# EAGLE board Schematic v12 (EAGLE 9.7.0)
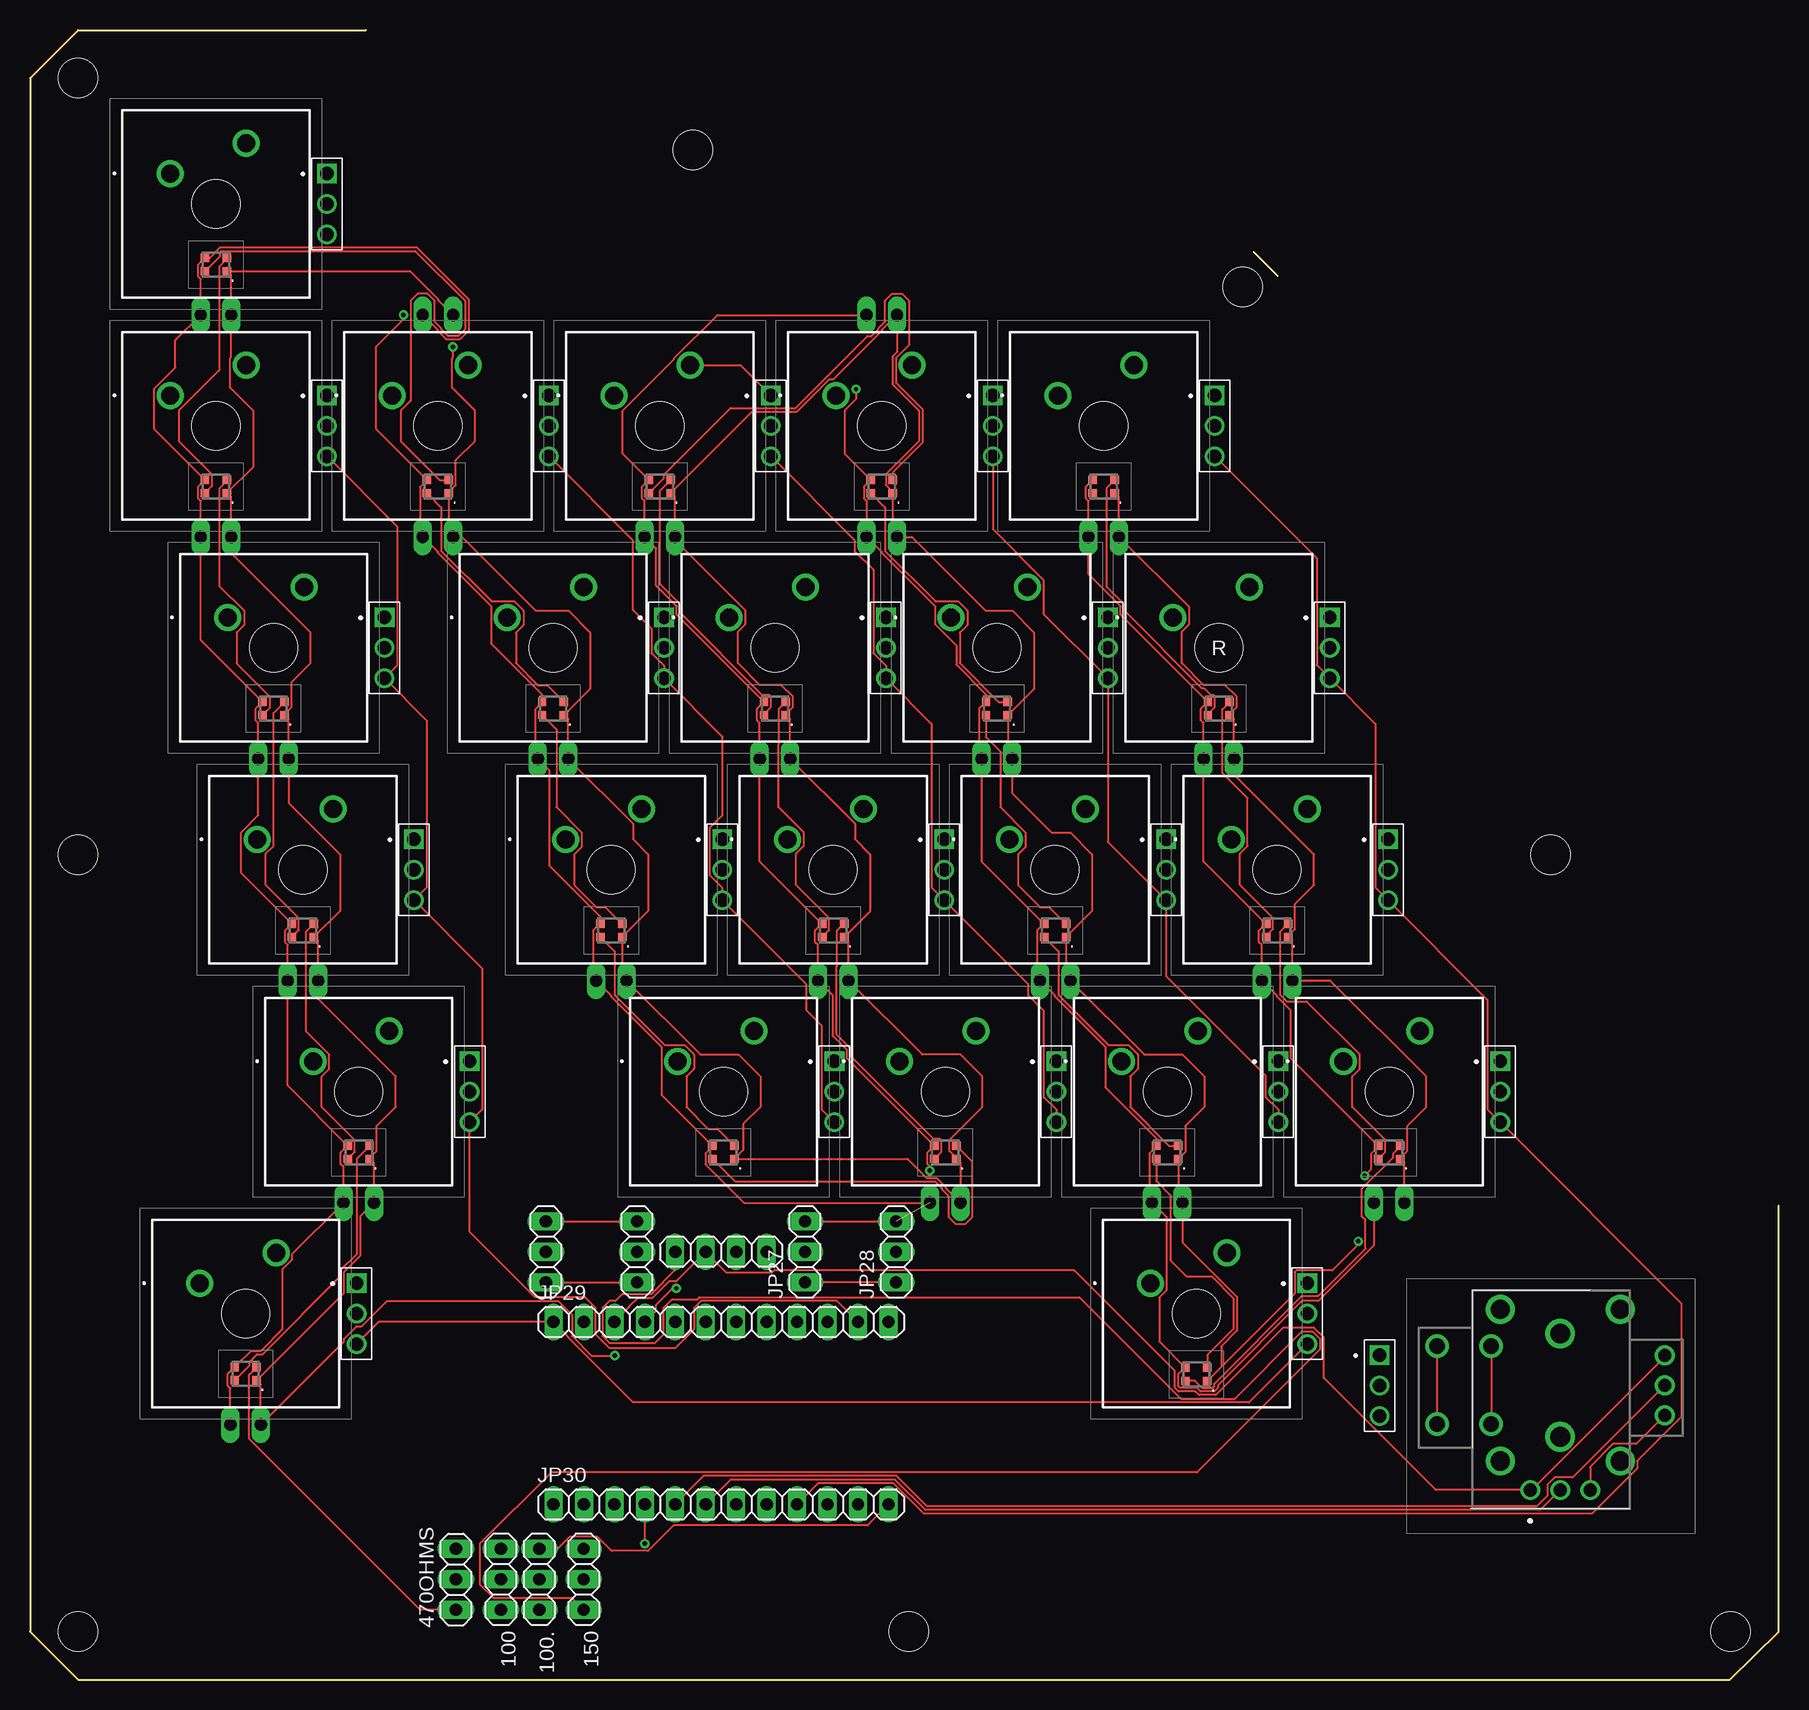
[diagram p0: board, top side]
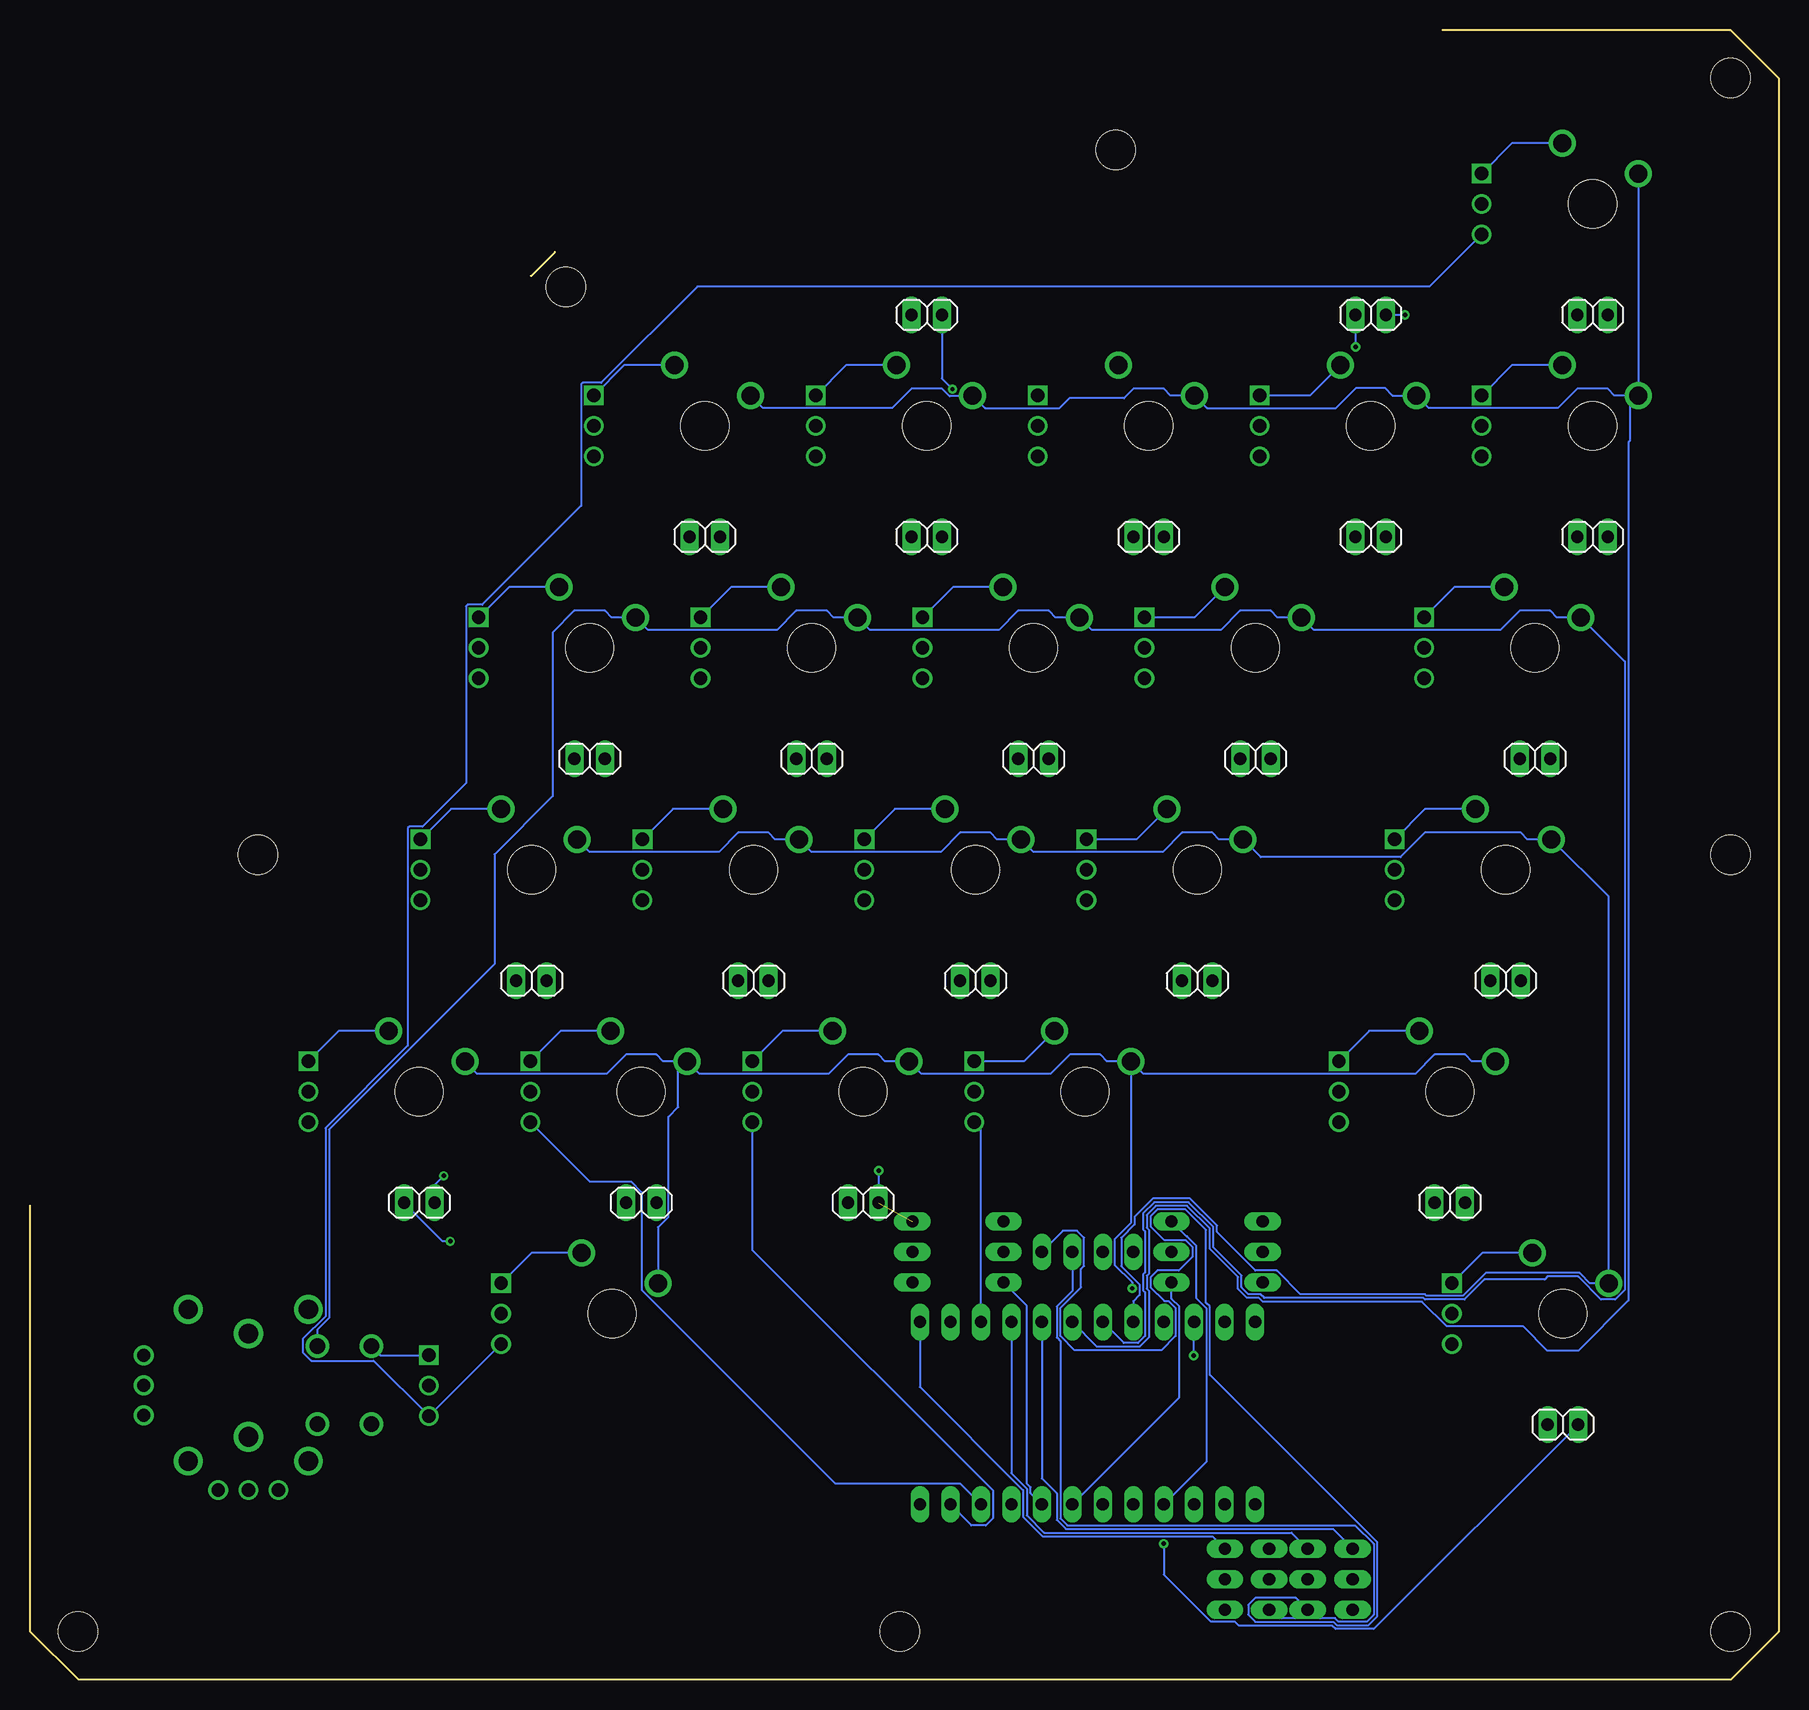
[diagram p1: board, bottom side, seen from below]

Size 145.75 x 137.5 mm. Coordinates in mm from the lower left corner, seen from the top.
Outline: 28,137.5 4,137.5 0,133.5 0,4 4,0 141.7,0 145.75,4 145.75,39.5
Outline: 104,117 102,119
Copper layers (1*16): Top / Bottom
Stack-up Default Layer Stack: Top User Defined 0.035mm / Dielectric-1 User Defined 1.5mm / Bottom User Defined 0.035mm
Design rules "default": minimum track width 6mil, minimum drill 0.35mm, track to track 6mil, track to pad 6mil, pad to pad 6mil, via to via 6mil, smd to smd 6mil, copper to edge 40mil, drill to drill 6mil, minimum pad ring 10mil, minimum via ring 8mil, stop-mask expansion 4mil, vias tented up to drill 0mil, thermal gap 10mil
Holes 3.25 mm at 4,133.5 4,4 141.75,4 101.08,116.08 73.25,4 4,68.75 126.75,68.75 55.25,127.5

## Footprints (pad centres in the part's own frame; a part is rotated, then mirrored left to right if it is on the bottom)
MX1AE1NW = drill 1.499 pad 2.248: 1 0,0; 2 6.35,2.54 | hole 3.988: 3.81,-2.54
1X03 = drill 1.016 long: 1 -2.54,0; 2 0,0; 3 2.54,0
RKJXV122400R = drill 1.3 pad 1.95: A1 -11.98,-3.25; B1 -11.98,-7.75; C1 -5.48,-3.25; D1 -5.48,-7.75 | drill 1.1 pad 1.65: A11 0,0; A12 0,2.5; A13 0,5; B11 -6.23,11.23; B12 -8.73,11.23; B13 -11.23,11.23 | drill 1.6 pad 2.4: MH1 -15.055,-2.5; MH2 -15.055,7.5; MH3 -2.405,-2.5; MH4 -2.405,7.5 | drill 1.65 pad 2.475: MH5 -13.03,2.5; MH6 -4.43,2.5
61300311121 = drill 1.1 square: 1 -2.54,0 | drill 1.1: 2 0,0; 3 2.54,0
1X04 = drill 1.016 long: 1 -3.81,0; 2 -1.27,0; 3 1.27,0; 4 3.81,0
1X02 = drill 1.016 long: 1 -1.27,0; 2 1.27,0
1X12 = drill 1.016 long: 1 -13.97,0; 2 -11.43,0; 3 -8.89,0; 4 -6.35,0; 5 -3.81,0; 6 -1.27,0; 7 1.27,0; 8 3.81,0; 9 6.35,0; 10 8.89,0; 11 11.43,0; 12 13.97,0
WS2812B2020 = smd 0.7 x 0.7: 1 0.915,-0.55; 2 0.915,0.55; 3 -0.915,0.55; 4 -0.915,-0.55

## Placement (x,y rotation side)
1  MX1A-E1NW  [MX1AE1NW]  30.19,107.04 0 top
2  MX1A-E1NW  [MX1AE1NW]  48.69,107.04 0 top
3  MX1A-E1NW  [MX1AE1NW]  67.19,107.04 0 top
4  MX1A-E1NW  [MX1AE1NW]  85.69,107.04 0 top
100  PINHD-1X3  [1X03]  39.25,8.35 270 top
100.  PINHD-1X3  [1X03]  42.45,8.35 270 top
150  PINHD-1X3  [1X03]  46.15,8.35 270 top
470OHMS  PINHD-1X3  [1X03]  35.5,8.35 90 top
A  MX1A-E1NW  [MX1AE1NW]  44.64,70.04 0 top
A_STICK  RKJXV122400R  [RKJXV122400R]  125.05,15.8 270 top
C  MX1A-E1NW  [MX1AE1NW]  90.99,51.54 0 top
CAPS  MX1A-E1NW  [MX1AE1NW]  18.94,70.04 0 top
CTRL  MX1A-E1NW  [MX1AE1NW]  14.16,33.04 0 top
D  MX1A-E1NW  [MX1AE1NW]  81.64,70.04 0 top
E  MX1A-E1NW  [MX1AE1NW]  76.79,88.54 0 top
ESC  MX1A-E1NW  [MX1AE1NW]  11.69,125.54 0 top
F  MX1A-E1NW  [MX1AE1NW]  100.14,70.04 0 top
J1  61300311121  [61300311121]  24.75,104.5 270 top
J2  61300311121  [61300311121]  24.75,123 270 top
J3  61300311121  [61300311121]  29.55,86 270 top
J4  61300311121  [61300311121]  32,67.5 270 top
J5  61300311121  [61300311121]  36.65,49 270 top
J6  61300311121  [61300311121]  27.23,30.5 270 top
J7  61300311121  [61300311121]  43.25,104.5 270 top
J8  61300311121  [61300311121]  52.85,86 270 top
J9  61300311121  [61300311121]  57.7,67.5 270 top
J10  61300311121  [61300311121]  67.05,49 270 top
J11  61300311121  [61300311121]  85.55,49 270 top
J12  61300311121  [61300311121]  76.2,67.5 270 top
J13  61300311121  [61300311121]  71.35,86 270 top
J14  61300311121  [61300311121]  61.75,104.5 270 top
J15  61300311121  [61300311121]  80.25,104.5 270 top
J16  61300311121  [61300311121]  89.85,86 270 top
J17  61300311121  [61300311121]  94.7,67.5 270 top
J18  61300311121  [61300311121]  104.05,49 270 top
J19  61300311121  [61300311121]  98.75,104.5 270 top
J20  61300311121  [61300311121]  108.35,86 270 top
J21  61300311121  [61300311121]  113.2,67.5 270 top
J22  61300311121  [61300311121]  122.55,49 270 top
J23  61300311121  [61300311121]  106.47,30.5 270 top
J26  61300311121  [61300311121]  112.5,24.5 270 top
JP1  PINHD-1X3  [1X03]  50.6,35.65 90 top
JP2  PINHD-1X3  [1X03]  43,35.65 90 top
JP3  PINHD-1X4  [1X04]  57.6,35.65 0 top
JP4  PINHD-1X2  [1X02]  17.98,21.25 0 bottom
JP5  PINHD-1X2  [1X02]  27.4,39.75 0 bottom
JP6  PINHD-1X2  [1X02]  22.75,58.25 0 bottom
JP7  PINHD-1X2  [1X02]  20.3,76.75 0 bottom
JP8  PINHD-1X2  [1X02]  15.5,95.25 0 bottom
JP9  PINHD-1X2  [1X02]  15.5,113.75 0 bottom
JP10  PINHD-1X2  [1X02]  34,113.75 0 bottom
JP11  PINHD-1X2  [1X02]  34,95.25 0 bottom
JP12  PINHD-1X2  [1X02]  43.6,76.75 0 bottom
JP13  PINHD-1X2  [1X02]  48.45,58.25 0 bottom
JP14  PINHD-1X2  [1X02]  76.3,39.75 0 bottom
JP15  PINHD-1X2  [1X02]  66.95,58.25 0 bottom
JP16  PINHD-1X2  [1X02]  62.1,76.75 0 bottom
JP17  PINHD-1X2  [1X02]  52.5,95.25 0 bottom
JP18  PINHD-1X2  [1X02]  71,113.75 0 bottom
JP19  PINHD-1X2  [1X02]  71,95.25 0 bottom
JP20  PINHD-1X2  [1X02]  80.6,76.75 0 bottom
JP21  PINHD-1X2  [1X02]  85.45,58.25 0 bottom
JP22  PINHD-1X2  [1X02]  94.8,39.75 0 bottom
JP23  PINHD-1X2  [1X02]  113.3,39.75 0 bottom
JP24  PINHD-1X2  [1X02]  103.95,58.25 0 bottom
JP25  PINHD-1X2  [1X02]  99.1,76.75 0 bottom
JP26  PINHD-1X2  [1X02]  89.5,95.25 0 bottom
JP27  PINHD-1X3  [1X03]  64.6,35.65 90 top
JP28  PINHD-1X3  [1X03]  72.2,35.65 90 top
JP29  PINHD-1X12  [1X12]  57.6,29.8 0 top
JP30  PINHD-1X12  [1X12]  57.6,14.6 0 top
LED1  WS2812B-2020  [WS2812B2020]  17.98,25.49 0 top
LED2  WS2812B-2020  [WS2812B2020]  27.4,43.95 0 top
LED3  WS2812B-2020  [WS2812B2020]  22.75,62.45 0 top
LED4  WS2812B-2020  [WS2812B2020]  20.3,80.95 0 top
LED5  WS2812B-2020  [WS2812B2020]  15.5,99.45 0 top
LED6  WS2812B-2020  [WS2812B2020]  15.5,117.95 0 top
LED7  WS2812B-2020  [WS2812B2020]  34,99.45 0 top
LED8  WS2812B-2020  [WS2812B2020]  43.6,80.95 0 top
LED9  WS2812B-2020  [WS2812B2020]  48.45,62.45 0 top
LED10  WS2812B-2020  [WS2812B2020]  57.8,43.95 0 top
LED11  WS2812B-2020  [WS2812B2020]  76.3,43.95 0 top
LED12  WS2812B-2020  [WS2812B2020]  66.95,62.45 0 top
LED13  WS2812B-2020  [WS2812B2020]  62.1,80.95 0 top
LED14  WS2812B-2020  [WS2812B2020]  52.5,99.45 0 top
LED15  WS2812B-2020  [WS2812B2020]  71,99.45 0 top
LED16  WS2812B-2020  [WS2812B2020]  80.6,80.95 0 top
LED17  WS2812B-2020  [WS2812B2020]  85.45,62.45 0 top
LED18  WS2812B-2020  [WS2812B2020]  94.8,43.95 0 top
LED19  WS2812B-2020  [WS2812B2020]  97.22,25.45 0 top
LED20  WS2812B-2020  [WS2812B2020]  113.3,43.95 0 top
LED21  WS2812B-2020  [WS2812B2020]  103.95,62.45 0 top
LED22  WS2812B-2020  [WS2812B2020]  99.1,80.95 0 top
LED23  WS2812B-2020  [WS2812B2020]  89.5,99.45 0 top
Q  MX1A-E1NW  [MX1AE1NW]  39.79,88.54 0 top
R  MX1A-E1NW  [MX1AE1NW]  95.29,88.54 0 top
S  MX1A-E1NW  [MX1AE1NW]  63.14,70.04 0 top
SHIFT  MX1A-E1NW  [MX1AE1NW]  23.59,51.54 0 top
SPACE  MX1A-E1NW  [MX1AE1NW]  93.42,33.04 0 top
TAB  MX1A-E1NW  [MX1AE1NW]  16.49,88.54 0 top
V  MX1A-E1NW  [MX1AE1NW]  109.49,51.54 0 top
W  MX1A-E1NW  [MX1AE1NW]  58.29,88.54 0 top
X  MX1A-E1NW  [MX1AE1NW]  72.49,51.54 0 top
Z  MX1A-E1NW  [MX1AE1NW]  53.99,51.54 0 top
~  MX1A-E1NW  [MX1AE1NW]  11.69,107.04 0 top

## Library data of the parts
1-4 A C CAPS CTRL D E ESC F Q R S SHIFT SPACE TAB V W X Z ~ = SamacSys_Parts; DESCRIPTION: Pushbutton Switches Full Travel, Mech. Keyswitch, Click Tactile Feel (Blue stem), 60cN, No LED, No Diode, Fixation Pins for PCB Mounting; HEIGHT: 15.2mm; MANUFACTURER_NAME: Cherry; MANUFACTURER_PART_NUMBER: MX1A-E1NW; MOUSER_PART_NUMBER: 540-MX1A-E1NW; MOUSER_PRICE-STOCK: https://www.mouser.co.uk/ProductDetail/CHERRY/MX1A-E1NW/?qs=Z7NFYKyvgJd45Wm4xzFv7w%3D%3D
100 100. 150 470OHMS JP1-JP30 = Connector; CATEGORY: CONNECTOR; SUB-CATEGORY: PIN-HEADER
A_STICK = SamacSys_Parts; DESCRIPTION: RKJXV122400R; HEIGHT: 18.95mm; MANUFACTURER_NAME: ALPS; MANUFACTURER_PART_NUMBER: RKJXV122400R; MOUSER_PART_NUMBER: 688-RKJXV122400R; MOUSER_PRICE-STOCK: https://www.mouser.co.uk/ProductDetail/ALPS/RKJXV122400R?qs=GedFDFLaBXEbB%252ByoOVwLBg%3D%3D
J1-J23 J26 = Headers; CREATED_BY: PCBLayout.com; DIGI_KEY_PART_NUMBER: 732-5316-ND; MANUFACTURER: Wurth Electronics Inc.; MPN: 61300311121
LED1-LED23 = WS2812B-2020; DESCRIPTION: LED; SMD; 2020; RGB; 2x2x0.84mm; 3.75.3V; Lens: transparent; 2kHz; HEIGHT: 0.84mm; MANUFACTURER_NAME: Worldsemi; MANUFACTURER_PART_NUMBER: WS2812B-2020

## Nets
N$1: J1.1 ~.2
N$2: ESC.2 J2.1
N$3: J3.1 TAB.2
N$4: CAPS.2 J4.1
N$5: J5.1 SHIFT.2
N$6: CTRL.2 J6.1
N$7: J11.1 X.2
N$8: J12.1 S.2
N$9: J13.1 W.2
N$10: 2.2 J14.1
N$11: 3.2 J15.1
N$12: E.2 J16.1
N$13: D.2 J17.1
N$14: C.2 J18.1
N$15: 4.2 J19.1
N$16: J20.1 R.2
N$17: F.2 J21.1
N$18: J22.1 V.2
N$19: J23.1 SPACE.2
N$20: 470OHMS.1 LED1.2
N$21: A.1 CAPS.1 CTRL.1 D.1 F.1 JP29.5 S.1
N$22: A_STICK.A1 A_STICK.C1 E.1 JP29.6 Q.1 R.1 TAB.1 W.1
N$23: 1.1 2.1 3.1 4.1 ESC.1 JP29.7 ~.1
N$24: 150.1 JP29.12
N$25: 1.2 J7.1
N$26: J8.1 Q.2
N$27: A.2 J9.1
N$28: J10.1 Z.2
N$29: J7.3 J8.3 J9.3 J10.3 JP29.10
N$30: J11.3 J12.3 J13.3 J14.3 JP30.11
N$31: J15.3 J16.3 J17.3 J18.3 JP30.10
N$32: J19.3 J20.3 J21.3 J22.3 JP30.9
N$33: J2.3 J6.3 J23.3 J26.3 JP29.1
N$34: 100..1 JP30.12
N$35: 100.1 JP29.9
N$36: 470OHMS.3 JP29.8
N$37: A_STICK.B12 JP30.5
N$38: 150.3 JP3.1
N$39: JP1.1 JP2.1 JP30.7
N$40: A_STICK.A13 A_STICK.B11
N$41: JP1.3 JP2.3 JP4.2 JP5.2 JP6.2 JP7.2 JP8.2 JP9.2 JP10.2 JP11.2 JP12.2 JP13.2 JP14.2 JP15.2 JP16.2 JP17.2 JP18.2 JP19.2 JP20.2 JP21.2 JP22.2 JP23.2 JP24.2 JP25.2 JP26.2 JP27.3 JP28.3 JP30.4 LED1.3 LED2.3 LED3.3 LED4.3 LED5.3 LED6.3 LED7.3 LED8.3 LED9.3 LED10.3 LED11.3 LED12.3 LED13.3 LED14.3 LED15.3 LED16.3 LED17.3 LED18.3 LED19.3 LED20.3 LED21.3 LED22.3 LED23.3
N$42: A_STICK.A12 JP30.6
N$43: LED1.4 LED2.2
N$44: C.1 JP29.4 SHIFT.1 SPACE.1 V.1 X.1 Z.1
N$45: A_STICK.B1 A_STICK.D1 J26.1
N$46: 100..3 JP3.3
N$47: LED2.4 LED3.2
N$48: LED3.4 LED4.2
N$49: LED4.4 LED5.2
N$50: LED5.4 LED6.2
N$51: LED6.4 LED7.2
N$52: LED7.4 LED8.2
N$53: LED8.4 LED9.2
N$54: LED9.4 LED10.2
N$55: LED10.4 LED11.2
N$56: LED11.4 LED12.2
N$57: LED12.4 LED13.2
N$58: LED13.4 LED14.2
N$59: LED14.4 LED15.2
N$60: LED15.4 LED16.2
N$61: LED16.4 LED17.2
N$62: LED17.4 LED18.2
N$63: LED18.4 LED19.2
N$64: LED19.4 LED20.2
N$65: LED20.4 LED21.2
N$66: LED21.4 LED22.2
N$67: LED22.4 LED23.2
N$68: A_STICK.A11 A_STICK.B13 JP3.2 JP4.1 JP5.1 JP6.1 JP7.1 JP8.1 JP9.1 JP10.1 JP11.1 JP12.1 JP13.1 JP14.1 JP15.1 JP16.1 JP17.1 JP18.1 JP19.1 JP20.1 JP21.1 JP22.1 JP23.1 JP24.1 JP25.1 JP26.1 JP29.3 LED1.1 LED2.1 LED3.1 LED4.1 LED5.1 LED6.1 LED7.1 LED8.1 LED9.1 LED10.1 LED11.1 LED12.1 LED13.1 LED14.1 LED15.1 LED16.1 LED17.1 LED18.1 LED19.1 LED20.1 LED21.1 LED22.1 LED23.1
N$70: 100.3 JP3.4
N$72: JP27.1 JP28.1 JP30.8
N$75: J1.3 J3.3 J4.3 J5.3 JP29.11

## Tracks (layer width: path | path; a pad name or v marks a point on that pad's centre or on a via)
N$1
  Bottom 0.152: ~.2 22.21,109.58 J1.1
N$2
  Bottom 0.152: ESC.2 22.21,128.08 J2.1
N$3
  Bottom 0.152: TAB.2 27.01,91.08 J3.1
N$4
  Bottom 0.152: CAPS.2 29.46,72.58 J4.1
N$5
  Bottom 0.152: SHIFT.2 34.11,54.08 J5.1
N$6
  Bottom 0.152: CTRL.2 24.68,35.58 J6.1
N$7
  Bottom 0.152: X.2 83.01,54.08 J11.1
N$8
  Bottom 0.152: S.2 73.66,72.58 J12.1
N$9
  Bottom 0.152: W.2 68.81,91.08 J13.1
N$10
  Top 0.152: 2.2 59.21,109.58 J14.1
N$11
  Bottom 0.152: 3.2 77.71,109.58 J15.1
N$12
  Bottom 0.152: E.2 87.31,91.08 J16.1
N$13
  Bottom 0.152: D.2 92.16,72.58 J17.1
N$14
  Bottom 0.152: C.2 101.51,54.08 J18.1
N$15
  Bottom 0.152: 4.2 96.21,109.58 J19.1
N$16
  Bottom 0.152: R.2 105.81,91.08 J20.1
N$17
  Bottom 0.152: F.2 110.66,72.58 J21.1
N$18
  Bottom 0.152: V.2 120.01,54.08 J22.1
N$19
  Bottom 0.152: SPACE.2 103.94,35.58 J23.1
N$20
  Top 0.152: 470OHMS.1 32.52,5.81 18.25,20.08 18.25,25.41 LED1.2
N$21
  Bottom 0.152: F.1 99.09,68.99 88.33,68.99 86.73,70.59 84.17,70.59 83.63,70.04 D.1 80.59,68.99 69.83,68.99 68.23,70.59 65.67,70.59 65.13,70.04 S.1 62.09,68.99 51.33,68.99 49.73,70.59 47.17,70.59 46.63,70.04 A.1 43.15,68.55 31.51,68.55 29.48,70.59 21.47,70.59 20.93,70.04 CAPS.1 14.16,65.27 CTRL.1 15.72,33.04 16.57,33.89 24.4,33.89 26.3,31.99 29.34,31.99 29.46,32.11 39.84,32.11 41.83,34.1 43.61,34.1 46.8,37.29 46.8,37.85 49.05,40.09 52.15,40.09 53.69,38.56 53.69,37.92 54.78,36.82 54.78,34.44 53.27,32.93 53.27,32.05 53.79,31.53 JP29.5
N$22
  Top 0.152: A_STICK.A1 A_STICK.C1
  Bottom 0.152: A_STICK.A1 121.8,29.15 120.82,30.14 120.82,45.85 107.04,59.63 107.04,68.78 102.19,73.63 102.19,87.28 100.38,89.09 97.82,89.09 97.28,88.54 R.1 94.23,87.48 83.48,87.48 81.88,89.09 79.32,89.09 78.78,88.54 E.1 75.74,87.49 64.98,87.49 63.38,89.09 60.82,89.09 60.28,88.54 W.1 57.24,87.49 46.48,87.49 44.88,89.09 42.32,89.09 41.78,88.54 Q.1 38.74,87.49 23.18,87.49 21.58,89.09 19.02,89.09 18.48,88.54 TAB.1 12.81,84.86 12.81,32.48 13.61,31.69 14.8,31.69 16.7,33.59 19.25,33.59 19.49,33.35 24.51,33.35 26.18,31.68 29.47,31.68 29.59,31.8 42.87,31.8 43.19,32.12 44.17,32.12 44.75,32.7 44.75,33.68 47.11,36.04 47.11,37.73 49.17,39.79 52.02,39.79 52.96,38.85 52.96,37.53 52.8,37.36 52.8,33.94 52.96,33.77 52.96,32.45 52.8,32.28 52.8,28.63 53.38,28.05 54.58,28.05 JP29.6
N$23
  Bottom 0.152: ESC.1 ~.1 | ~.1 13.68,107.04 14.22,107.59 16.78,107.59 18.38,105.99 29.14,105.99 1.1 32.18,107.04 32.81,107.68 35.19,107.68 36.88,105.99 47.64,105.99 2.1 50.68,107.04 51.22,107.59 53.78,107.59 54.56,106.81 59.11,106.81 59.93,105.99 66.14,105.99 3.1 68.1,107.04 68.18,106.96 69.1,106.96 69.72,107.59 72.28,107.59 73.88,105.99 84.64,105.99 4.1 | ~.1 12.41,106.32 12.41,103.22 12.51,103.13 12.51,31.6 16.7,27.41 19.25,27.41 21.29,29.45 27.66,29.45 29.71,31.5 43,31.5 43.31,31.82 44.3,31.82 45.06,32.57 45.06,33.56 47.41,35.91 47.41,37.6 49.3,39.48 51.9,39.48 52.66,38.73 52.66,37.65 52.49,37.49 52.49,33.81 52.66,33.65 52.66,32.57 52.49,32.41 52.49,28.5 53.25,27.74 56.81,27.74 JP29.7
N$24
  Bottom 0.152: JP29.12 71.57,24.38 62.96,15.77 62.96,13.55 61.34,11.93 47.19,11.93 150.1
N$25
  Bottom 0.152: 1.2 39.08,107.04 J7.1
N$26
  Bottom 0.152: Q.2 48.68,88.54 J8.1
N$27
  Bottom 0.152: A.2 53.53,70.04 J9.1
N$28
  Bottom 0.152: Z.2 62.88,51.54 J10.1
N$29
  Top 0.152: J7.3 50.24,94.97 50.24,89.18 51.8,87.62 51.8,85.56 52.85,84.51 J8.3 57.7,78.61 57.7,72.01 56.65,70.96 56.65,67.06 57.7,66.01 J9.3 64.69,57.97 64.69,55.81 66,54.51 66,47.51 J10.3
  Bottom 0.152: 67.08,46.46 J10.3 66.49,45.9 JP29.10
N$30
  Top 0.152: J14.3 68.74,94.97 68.74,94.08 70.3,92.52 70.3,85.56 71.35,84.51 J13.3 75.15,79.66 75.15,66.01 J12.3 83.19,57.97 83.19,57.08 84.5,55.77 84.5,48.56 85.55,47.51 J11.3
  Bottom 0.152: J11.3 85.55,35.82 65.5,15.77 65.5,13.43 66.08,12.85 67.28,12.85 JP30.11
N$31
  Top 0.152: J15.3 80.25,95.88 84.49,91.64 84.49,88.82 J16.3 89.85,69.81 J17.3 94.7,58.63 103,50.34 103,48.56 104.05,47.51 J18.3
  Bottom 0.152: J18.3 99.09,41.5 95.66,41.5 94.77,40.61 94.77,32.48 78.64,16.35 68.24,16.35 JP30.10
N$32
  Top 0.152: J19.3 107.25,93.46 107.25,84.56 J20.3 112.15,79.66 112.15,66.01 J21.3 121.5,56.66 121.5,47.51 J22.3 137.64,31.37 137.64,21.89 133.98,18.23 133.98,17.61 130.2,13.83 74.5,13.83 71.98,16.35 65.7,16.35 JP30.9
N$33
  Top 0.152: J6.3 29.07,29.8 JP29.1 44.88,28.55 44.88,28.5 50.27,23.1 101.62,23.1 J23.3
  Bottom 0.152: J23.3 112.47,21.96 J26.3 117.12,26.58 122.3,26.58 123,27.28 123,28.38 121.12,30.26 121.12,45.97 114.25,52.84 114.25,70.96 114.12,71.09 113.03,71.09 109.4,74.72 109.4,89.46 109.27,89.59 108.05,89.59 99.8,97.84 99.8,107.96 99.67,108.09 98.13,108.09 90.11,116.11 29.1,116.11 J2.3
N$34
  Top 0.152: JP30.12 69.82,12.85 53.63,12.85 51.5,10.72 48.48,10.72 47.32,11.88 44.98,11.88 43.99,10.89 100..1
N$35
  Bottom 0.152: JP29.9 63.95,17.19 62.66,15.9 62.66,13.68 61.21,12.24 40.6,12.24 100.1
N$36
  Bottom 0.152: JP29.8 61.41,16.76 60.16,15.52 60.16,13.3 59.41,12.54 37.15,12.54 470OHMS.3
N$37
  Top 0.152: A_STICK.B12 128.6,16.85 127.11,16.85 126.5,16.24 126.5,15.32 125.61,14.44 74.75,14.44 72.23,16.96 56.15,16.96 JP30.5
N$38
  Top 0.152: 150.3 45.16,6.8 38.64,6.8 37.5,7.94 37.5,11.3 43.46,17.27 97.27,17.27 107.53,27.52 107.53,28.4 106.91,29.01 106.04,29.01 100.43,23.41 95.92,23.41 87.47,31.86 55.79,31.86 55.63,31.7 53.52,31.7 52.8,30.97 52.8,28.76 52.09,28.05 48.3,28.05 47.72,28.63 47.72,30.97 48.3,31.55 48.8,31.55 49.37,32.12 51.77,32.12 53.79,34.14 JP3.1
N$39
  Top 0.152: JP2.1 JP1.1
  Bottom 0.152: JP1.1 50.6,31.74 49.95,31.1 49.95,23.52 JP30.7
N$40
  Top 0.152: A_STICK.B11 133.88,19.63 131.96,19.63 130.05,17.73 A_STICK.A13
N$41  (via drill 0.35)  (1 unrouted)
  Top 0.152: JP2.3 JP1.3 | JP27.3 JP28.3 | v51.25,11.33 JP30.4 | JP4.2 16.7,24.28 16.48,24.5 16.48,25.47 LED1.3 18.43,27.41 19.25,27.41 21.06,29.22 21.06,34.21 21.87,35.02 21.87,35.49 JP5.2 26.13,42.73 25.91,42.95 25.91,43.92 LED2.3 21.48,49.51 JP6.2 21.48,61.23 21.26,61.45 21.26,62.42 LED3.3 17.59,67.25 17.59,70.6 19.03,72.04 JP7.2 19.03,79.73 18.81,79.95 18.81,80.92 LED4.3 14.23,86.66 JP8.2 14.23,98.23 14.01,98.45 14.01,99.42 LED5.3 10.34,104.25 10.34,107.6 12.11,109.37 12.11,111.63 JP9.2 14.23,116.73 14.01,116.95 14.01,117.92 LED6.3 14.96,118.5 15.84,119.38 32.23,119.38 36.56,115.05 36.56,112.45 35.81,111.69 34.73,111.69 33.98,112.45 33.98,112.5 JP10.2 | v31.13,113.75 31.13,113.38 28.84,111.09 28.84,104.25 LED7.3 32.5,99.41 32.5,95.48 JP11.2 33.98,94 33.98,93.95 38.44,89.49 38.44,86.37 42.69,82.12 LED8.3 42.69,81.42 42.11,80.84 42.11,76.97 JP12.2 43.29,75.79 43.29,67.87 47.53,63.62 LED9.3 46.96,62.42 46.96,58.47 JP13.2 48.42,57 48.42,56.95 52.64,52.74 52.64,48.75 LED10.3 56.88,44.42 56.31,43.84 56.31,42.95 59.51,39.75 JP14.2 | v75,42.41 75,42.76 74.81,42.95 74.81,43.92 LED11.3 68.1,51.78 68.1,52.46 66.92,53.64 66.92,57 JP15.2 65.68,61.23 65.46,61.45 65.46,62.42 LED12.3 60.83,68.2 JP16.2 60.83,79.73 60.61,79.95 60.61,80.92 LED13.3 53.9,88.78 53.9,89.46 52.2,91.17 52.2,94.28 JP17.2 51.23,98.23 51.01,98.45 51.01,99.42 LED14.3 49.41,102.17 49.41,105.78 53.69,110.05 53.69,110.14 57.3,113.75 JP18.2 | v68.84,107.57 68.84,106.71 67.91,105.78 67.91,102.17 LED15.3 69.51,99.42 69.51,98.45 69.73,98.23 JP19.2 70.97,94 70.97,93.95 75.44,89.49 75.44,87.98 77.21,86.21 77.21,84.59 79.69,82.12 LED16.3 79.11,80.92 79.11,76.97 JP20.2 79.33,68.2 LED17.3 83.96,62.42 83.96,58.47 JP21.2 85.42,57 85.42,56.95 89.64,52.74 89.64,49.37 93.89,45.12 LED18.3 93.89,44.42 93.31,43.84 93.31,39.97 JP22.2 94.77,38.51 94.77,32.48 94.14,31.85 94.14,28.17 96.28,26.03
  Top 0.152: 96.28,26.03 LED19.3 | v111.25,42 111.81,42.55 111.81,43.84 112.39,44.42 LED20.3 105.1,51.78 105.1,55.77 103.92,56.95 103.92,57 JP24.2 102.68,61.23 102.46,61.45 102.46,62.42 LED21.3 97.83,68.2 JP25.2 97.83,79.73 97.61,79.95 97.61,80.92 LED22.3 90.9,88.78 90.9,89.46 88.23,92.13 JP26.2 88.23,98.23 88.01,98.45 88.01,99.42 LED23.3 | JP23.2 112.03,36.19 107.39,31.55 106.04,31.55 99.02,24.54 99.02,24.33 98.71,24.02 97.57,24.02 97.26,24.32 95.86,24.32 95.73,24.45 95.73,25.48 96.28,26.03
  Bottom 0.152: JP30.4 47.7,18.14 47.7,30.96 48.54,31.8 48.54,36.19 49.3,36.95 49.35,36.95 JP1.3 | JP4.2 33.74,4.21 36.92,4.21 37.22,4.5 45,4.5 45.32,4.82 47.32,4.82 51.25,8.75 v51.25,11.33 | v31.13,113.75 JP10.2 | v75,42.41 75.03,42.38 JP14.2 | JP18.2 69.73,108.45 v68.84,107.57 | JP23.2 112.03,41.22 v111.25,42
N$42
  Top 0.152: A_STICK.A12 125.89,14.14 74.63,14.14 72.11,16.66 58.39,16.66 JP30.6
N$43
  Top 0.152: LED1.4 18.31,26.2 18.31,26.49 18.93,27.11 19.38,27.11 25.87,33.6 25.87,34.09 27.25,35.47 27.25,43.44 LED2.2
N$44  (via drill 0.35)
  Top 0.152: JP29.4 52.19,30.74 52.19,31.23 53.58,32.61 v53.87,32.61
  Bottom 0.152: SHIFT.1 25.58,51.54 26.12,52.09 28.68,52.09 30.28,50.49 52.94,50.49 Z.1 | Z.1 55.98,51.54 56.52,52.09 59.08,52.09 60.68,50.49 71.44,50.49 X.1 74.48,51.54 75.02,52.09 77.58,52.09 79.18,50.49 89.94,50.49 90.97,51.52 | 90.97,51.52 C.1 92.98,51.54 93.52,52.09 96.08,52.09 97.68,50.49 108.49,50.49 109.49,51.49 V.1 | SPACE.1 93.42,37.7 92.54,38.58 92.54,46.9 91.71,47.72 91.71,50.79 90.97,51.52 | Z.1 53.99,38.04 55.34,36.7 55.34,34.57 53.87,33.1 v53.87,32.61
N$45
  Top 0.152: A_STICK.D1 A_STICK.B1
  Bottom 0.152: A_STICK.B1 116.56,27.04 J26.1
N$46
  Bottom 0.152: JP3.3 58.87,32.39 60.16,31.1 60.16,28.5 59.86,28.2 59.86,13.43 59.28,12.85 35.29,12.85 33.75,11.3 33.75,5.4 34.33,4.82 36.67,4.82 36.96,5.11 41.75,5.11 100..3
N$47
  Top 0.152: LED2.4 27.06,43.98 27.06,44.97 24.31,47.72 24.31,50.28 24.94,50.91 24.94,52.1 23.03,54.01 23.03,62.36 LED3.2
N$48
  Top 0.152: LED3.4 22.41,62.48 22.41,63.47 19.66,66.22 19.66,68.85 20.29,69.48 20.29,80.58 LED4.2
N$49
  Top 0.152: LED5.2 16.41,99.92 15.78,99.29 15.78,91.16 17.84,89.1 17.84,87.91 17.21,87.28 17.21,84.69 19.96,81.94 19.96,80.98 LED4.4
N$50
  Top 0.152: LED5.4 15.16,99.48 15.16,100.47 12.41,103.22 12.41,105.78 15.78,109.14 15.78,117.79 16.41,118.42 LED6.2
N$51
  Top 0.152: LED6.4 15.84,118.65 15.84,118.94 15.97,119.08 32.1,119.08 36.26,114.92 36.26,112.58 35.68,112 34.86,112 34.28,112.58 34.28,112.63 33.72,113.19 33.72,114.92 33.14,115.5 32.32,115.5 31.74,114.92 31.74,106.6 30.91,105.78 30.91,103.22 34.14,100 LED7.2
N$52
  Top 0.152: LED7.4 34.28,97.71 34.28,94.08 38.46,89.89 40.35,89.89 41.14,89.1 41.14,87.91 40.51,87.28 40.51,84.72 42.32,82.91 43.1,82.91 LED8.2
N$53
  Top 0.152: LED8.4 43.88,79.21 43.88,72.71 45.99,70.6 45.99,69.41 45.36,68.78 45.36,66.22 47.17,64.41 47.95,64.41 LED9.2
N$54
  Top 0.152: LED9.4 48.73,60.71 48.73,57.08 52.91,52.89 54.55,52.89 55.34,52.1 55.34,50.91 54.71,50.28 54.71,47.72 56.52,45.91 57.3,45.91 LED10.2
N$55
  Top 0.152: LED10.4 58.78,41.5 75.44,41.5 76.02,40.92 76.02,40.87 76.58,40.31 76.58,38.58 77.16,38 77.98,38 78.56,38.58 78.56,43.15 LED11.2
N$56
  Top 0.152: LED11.4 75.96,43.98 75.96,44.95 75.83,45.08 75.33,45.08 68.41,52 68.41,52.59 67.23,53.77 67.23,59.42 67.29,59.48 67.29,62.42 LED12.2
N$57
  Top 0.152: LED12.4 66.61,62.48 66.61,63.47 63.86,66.22 63.86,68.85 64.49,69.48 64.49,69.49 64.5,69.5 64.5,70.59 62.38,72.71 62.38,77.92 62.44,77.98 62.44,80.92 LED13.2
N$58
  Top 0.152: LED13.4 61.19,80.48 61.76,81.06 61.76,81.94 61.63,82.08 61.04,82.08 54.21,88.91 54.21,89.59 52.5,91.29 52.5,99.09 LED14.2
N$59
  Top 0.152: LED14.4 52.84,100.15 52.84,100.44 58.38,105.99 63.79,105.99 69.8,112 70.14,112 70.72,112.58 70.72,112.63 71.28,113.19 71.28,114.92 71.86,115.5 72.68,115.5 73.26,114.92 73.26,111.21 72.19,110.14 72.19,108.11 74.39,105.91 74.39,103.09 71.92,100.62 LED15.2
N$60
  Top 0.152: LED15.4 71.28,97.71 71.28,94.08 75.46,89.89 77.35,89.89 78.14,89.1 78.14,87.91 77.51,87.28 77.51,84.72 80.74,81.5 LED16.2
N$61
  Top 0.152: LED16.4 79.69,78.56 80.88,77.36 80.88,72.71 82.99,70.6 82.99,69.41 82.36,68.78 82.36,66.22 84.17,64.41 84.95,64.41 LED17.2
N$62
  Top 0.152: LED17.4 85.73,60.71 85.73,57.08 89.91,52.89 91.55,52.89 92.34,52.1 92.34,50.91 91.71,50.28 91.71,47.72 94.94,44.5 LED18.2
N$63
  Top 0.152: LED18.4 93.89,41.56 95.07,40.37 95.07,34.93 96.41,33.59 98.5,33.59 100.31,31.78 100.31,29.22 98.14,27.05 LED19.2
N$64
  Top 0.152: LED19.4 97.12,24.9 97.69,24.32 98.58,24.32 98.72,24.45 98.72,24.66 106.04,31.99 107.39,31.99 111.32,35.91 111.32,38.3 111.04,38.58 111.04,40.92 113.64,43.52 113.64,43.84 114.22,44.42 LED20.2
N$65
  Top 0.152: LED20.4 112.96,43.98 112.96,44.97 110.21,47.72 110.21,50.28 110.84,50.91 110.84,52.1 106.44,56.5 104.81,56.5 104.23,57.08 104.23,62.36 LED21.2
N$66
  Top 0.152: LED21.4 103.03,61.98 103.61,62.55 103.61,63.47 100.86,66.22 100.86,68.85 101.49,69.48 101.49,73.46 99.38,75.58 99.38,80.86 LED22.2
N$67
  Top 0.152: LED22.4 98.19,80.48 98.76,81.06 98.76,81.94 98.63,82.08 98.42,82.08 97.89,82.61 97.69,82.61 91.21,89.1 91.21,89.59 89.75,91.04 89.75,99.34 LED23.2
N$68  (via drill 0.35)
  Top 0.152: A_STICK.B13 136.28,26.89 125.16,15.76 125.09,15.76 A_STICK.A11 117.17,15.8 107.83,25.14 107.83,28.52 107.04,29.32 104.44,29.32 98.84,23.71 97.44,23.71 97.14,24.02 95.74,24.02 95.43,24.33 95.43,25.73 87.05,34.1 62.02,34.1 61.82,33.9 58.08,33.9 JP3.2 53.9,33.22 53.3,33.22 51.9,31.82 50.67,31.82 49.95,31.1 49.95,31.05 JP29.3 | v48.75,27 46.81,27 45.18,28.63 45.18,30.41 44.04,31.55 29.77,31.55 27.66,29.45 27.22,29.45 26.17,28.4 26.17,28.18 JP4.1 19.25,24.59 LED1.1 26.17,32.23 26.17,33.96 27.55,35.34 27.55,38.63 JP5.1 28.67,43.05 LED2.1 28.32,43.48 28.89,44.05 28.89,46.13 30.49,47.72 30.49,50.28 24.02,56.74 JP6.1 24.02,61.55 LED3.1 25.84,64.07 25.84,68.78 21.57,73.04 JP7.1 21.57,80.05 LED4.1 21.21,80.48 21.79,81.06 21.79,83.13 23.39,84.72 23.39,87.28 16.77,93.89 JP8.1 16.77,98.55 LED5.1 18.59,101.07 18.59,105.78 16.69,107.68 16.69,110.14 16.77,110.22 JP9.1 16.77,117.05 LED6.1 31.67,117.4 34.02,115.05 34.02,115 JP10.1 | v35.25,111.09 35.25,110.2 35.19,110.14 35.19,107.68 37.09,105.78 37.09,103.22 35.49,101.63 35.49,99.56 34.91,98.98 LED7.1 34.91,95.6 JP11.1 36,95.25 42.16,89.09 44.88,89.09 46.69,87.28 46.69,82.57 LED8.1 44.87,80.05 JP12.1 50.25,71.37 50.25,70.06 51.54,68.78 51.54,64.07 LED9.1 49.37,58.61 JP13.1 55.88,52.09 59.08,52.09 60.89,50.28 60.89,47.72 59.46,46.29 59.46,44.14 LED10.1 73.16,43.4 74.75,41.81 75.57,41.81 76.33,41.05 76.33,40.99 JP14.1 77.57,43.05 LED11.1 77.22,43.48 76.64,44.05 76.64,44.97 79.39,47.72 79.39,50.28 77.58,52.09 74.38,52.09 JP15.1 68.22,61.55 67.88,61.88 | 67.88,61.88 LED12.1
  Top 0.152: 67.88,61.88 70.04,64.04 70.04,68.78 68.75,70.06 68.75,71.37 JP16.1 63.37,80.05 LED13.1 63.02,80.48 63.59,81.06 63.59,81.94 62.62,82.91 60.82,82.91 59.01,84.72 59.01,87.35 59.64,87.98 59.64,89.1 53.77,94.97 JP17.1 53.77,98.55 LED14.1 60.2,105.68 63.92,105.68 66.63,108.39 66.97,108.39 71.03,112.45 71.03,112.5 JP18.1 72.27,110.65 71.88,110.27 71.88,107.98 74.09,105.78 74.09,103.22 71.34,100.47 71.34,99.56 71.92,98.98 LED15.1 71.92,95.6 JP19.1 73.5,95.25 79.66,89.09 81.88,89.09 83.69,87.28 83.69,82.57 LED16.1 81.52,77.1 JP20.1 81.87,73.88 85.16,70.59 86.73,70.59 88.54,68.78 88.54,64.07 LED17.1 86.36,58.61 JP21.1 92.88,52.09 96.08,52.09 97.89,50.28 97.89,47.72 96.29,46.13 96.29,43.98 LED18.1 95.72,40.1 JP22.1 96.07,36.45 100.62,31.91 100.62,29.09 99.3,27.77 99.3,26.05 LED19.1 105.42,32.18 105.42,33.96 105.56,34.09 108.56,34.09 110.71,36.25 v110.71,36.54 | JP23.1 114.57,43.05 LED20.1 114.22,43.48 114.79,44.05 114.79,46.13 116.39,47.72 116.39,50.28 108.41,58.25 JP24.1 105.22,61.55 LED21.1 104.86,61.98 105.44,62.55 105.44,64.63 107.04,66.22 107.04,68.78 100.37,75.44 JP25.1 100.37,80.05 LED22.1 100.02,80.48 100.59,81.06 100.59,81.94 99.62,82.91 97.82,82.91 96.01,84.72 96.01,87.35 96.64,87.98 96.64,89.38 JP26.1 90.77,98.55 LED23.1
  Bottom 0.152: v48.75,27 48.71,27.04 JP29.3 | v35.25,111.09 35.25,113.73 JP10.1 | v110.71,36.54 111.36,36.54 JP23.1
N$70
  Bottom 0.152: 100.3 40.24,6.8 43.62,6.8 44.2,6.22 44.2,5.4 43.61,4.8 37.09,4.8 36.8,4.52 34.2,4.52 33.44,5.27 33.44,11.43 47.4,25.38 47.4,31.08 47.72,31.4 47.72,37.47 49.43,39.18 51.77,39.18 52.35,38.6 52.35,37.78 51.21,36.64 49.43,36.64 48.85,36.06 48.85,35.24 49.99,34.1 51.77,34.1 52.35,33.52 52.35,32.7 51.21,31.55 50.84,31.55 50.26,30.97 50.26,28.63 51.45,27.44 58.67,27.44 59.86,28.63 59.86,30.97 58.14,32.69 58.14,34.22 57.88,34.48 57.88,36.82 58.46,37.4 59.66,37.4 JP3.4
N$72
  Top 0.152: JP28.1 JP27.1
  Bottom 0.152: JP27.1 62.66,31.16 62.66,16.33 62.35,16.02 62.35,15.54 JP30.8
N$75
  Top 0.152: J1.3 30.6,96.11 30.6,84.51 J3.3 33.05,79.96 33.05,66.01 J4.3 37.7,59.26 37.7,47.51 J5.3 36.65,37.3 42.09,31.86 46.28,31.86 47.16,30.97 47.16,28.76 48.31,27.61 53.76,27.61 55.34,29.19 55.34,30.97 55.92,31.55 67.28,31.55 JP29.11